# Altium PCB Etage Reception 2.PcbDoc
Units mm, origin at the board's own origin, x right, y up, seen from the top; angles counter-clockwise.
Board outline 70 x 70 mm, 4 copper layers (Top Layer, Internal Plane 1, Internal Plane 2, Bottom Layer); 25 components, 18 nets, 69 pads, 0 vias.
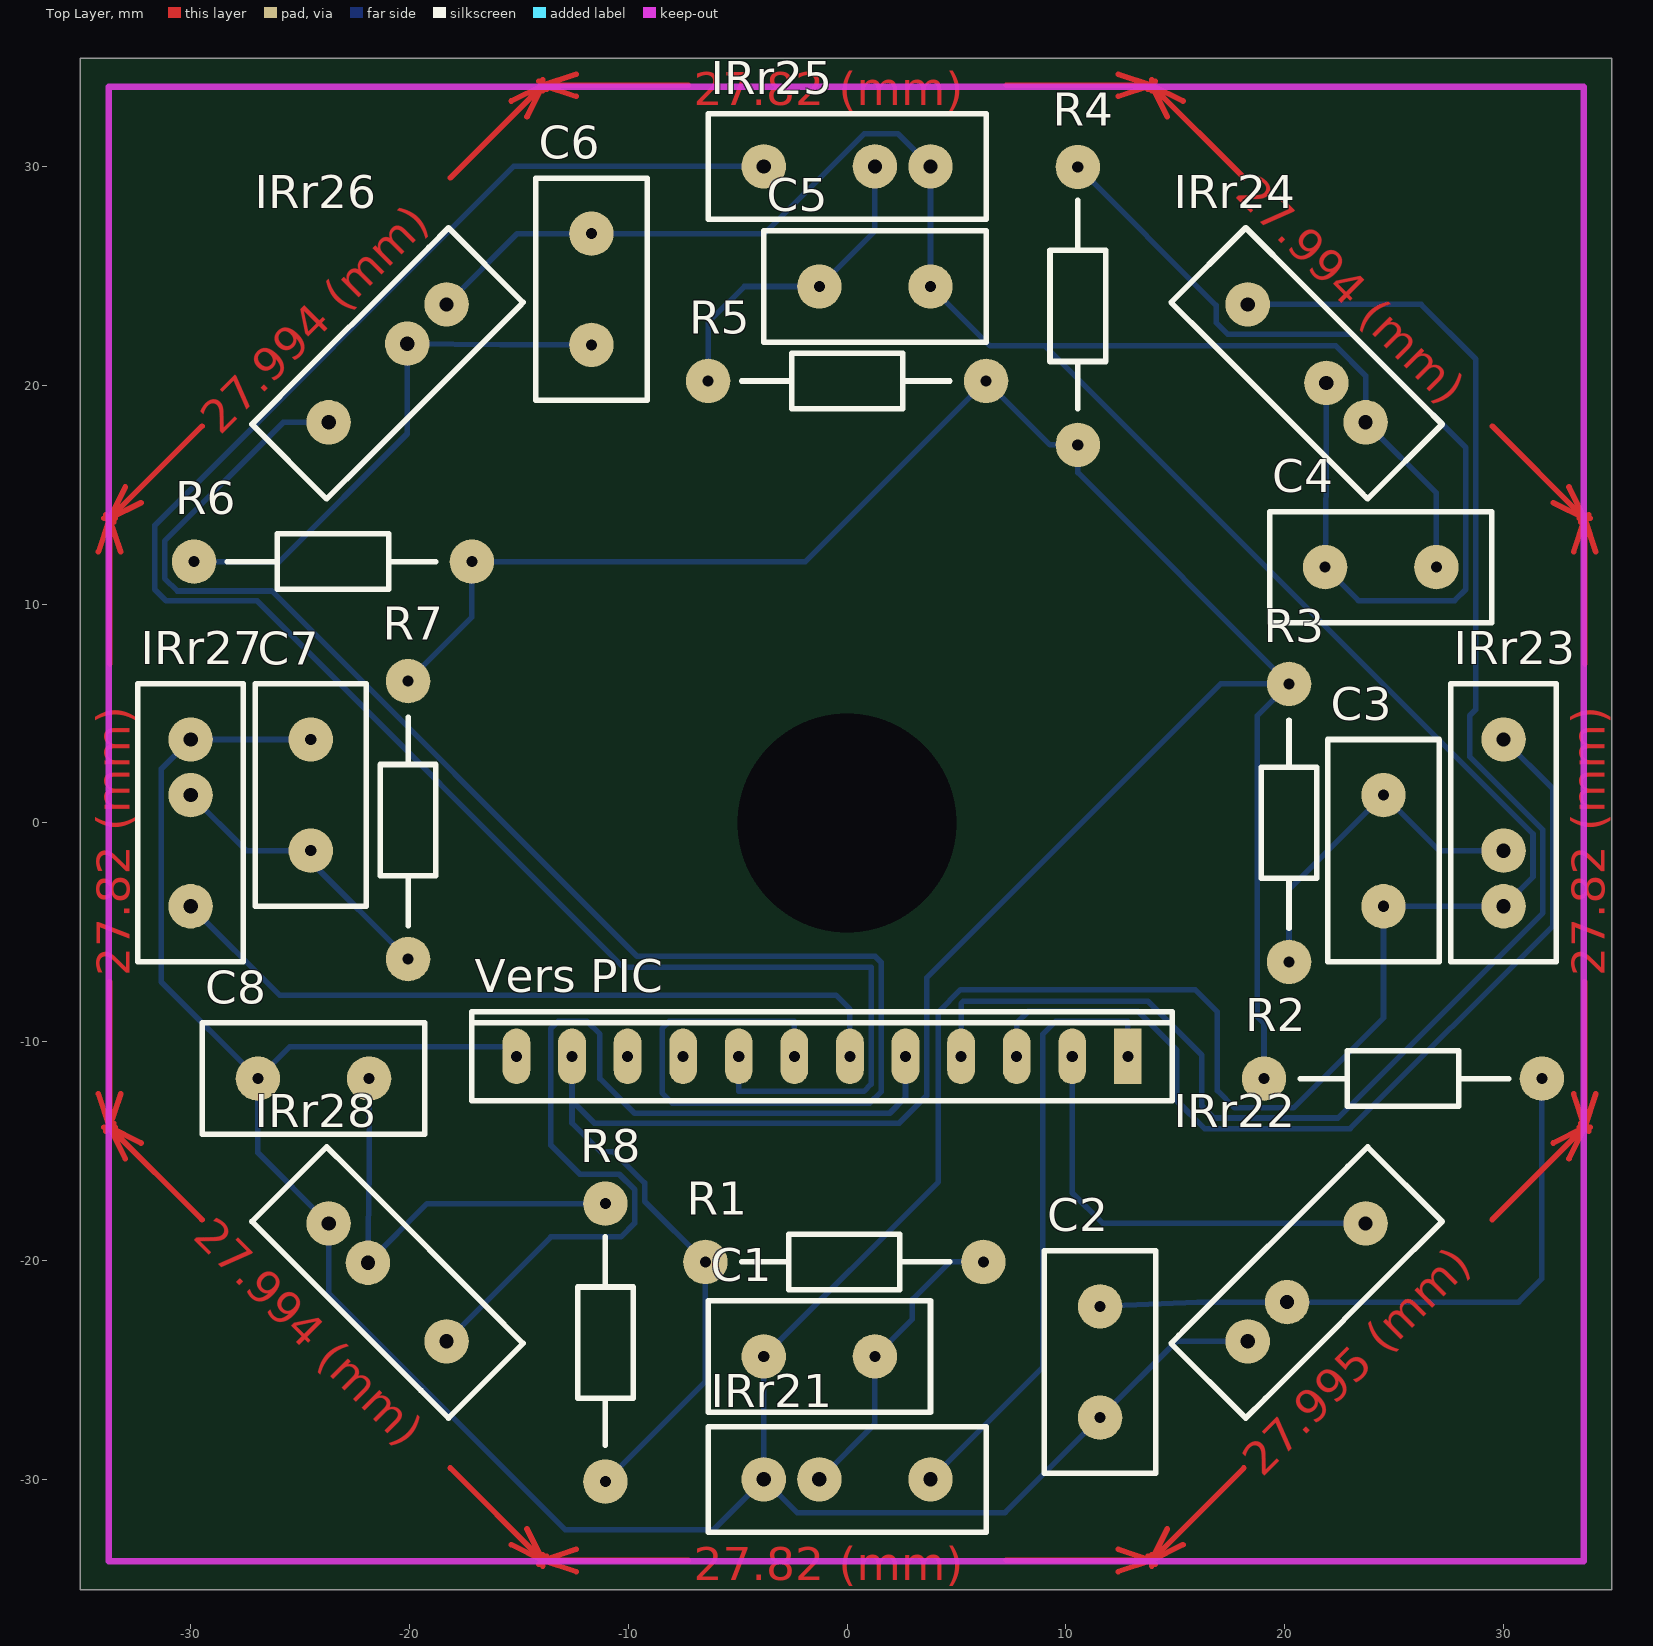
[diagram p0: Top Layer view]
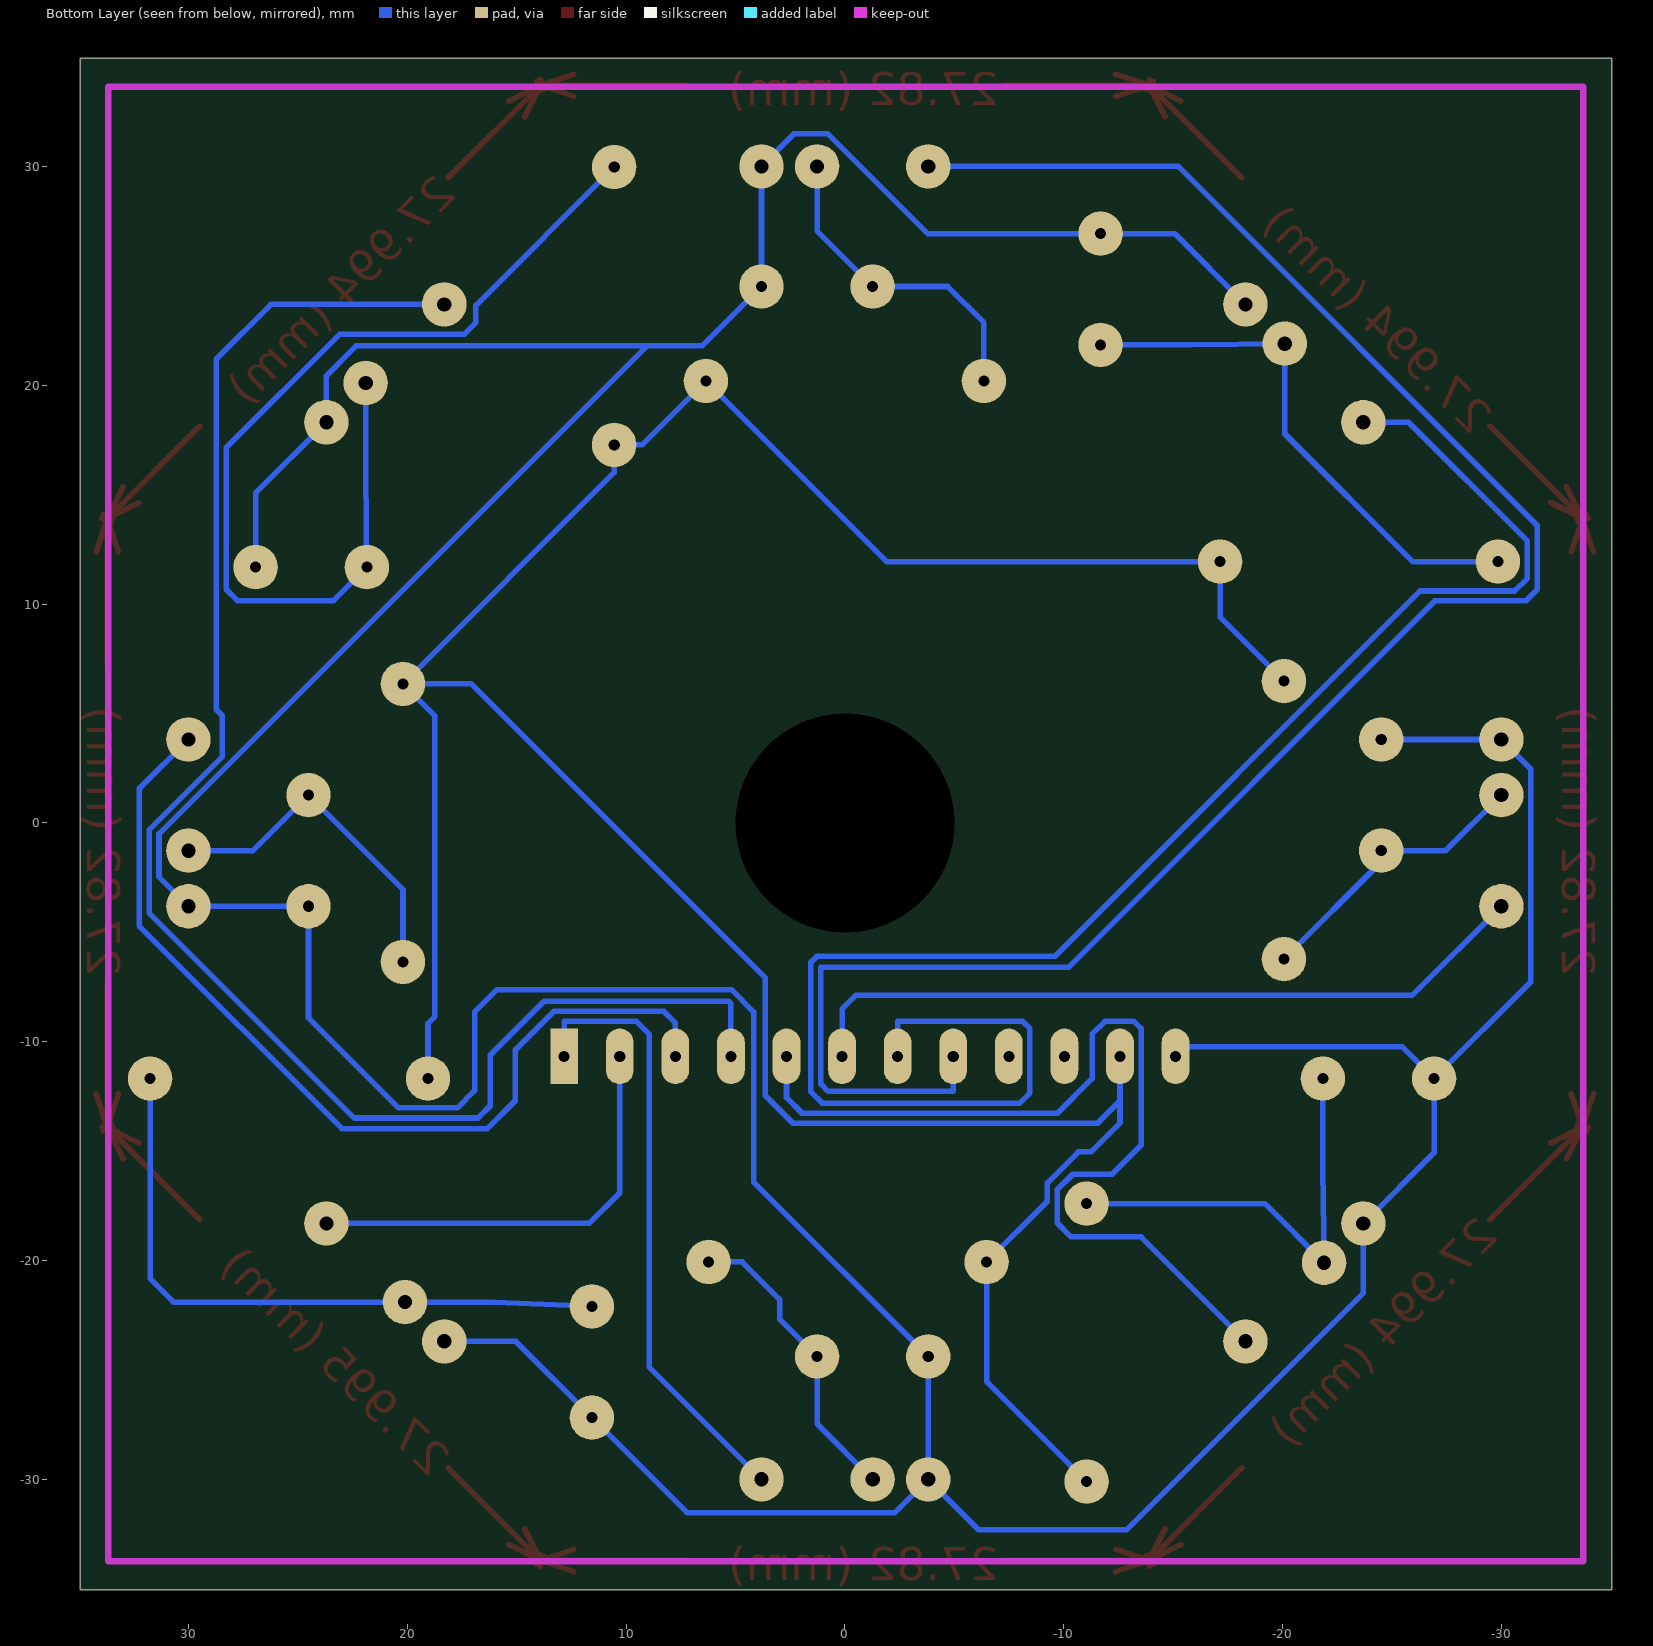
[diagram p1: Bottom Layer view, seen from below]
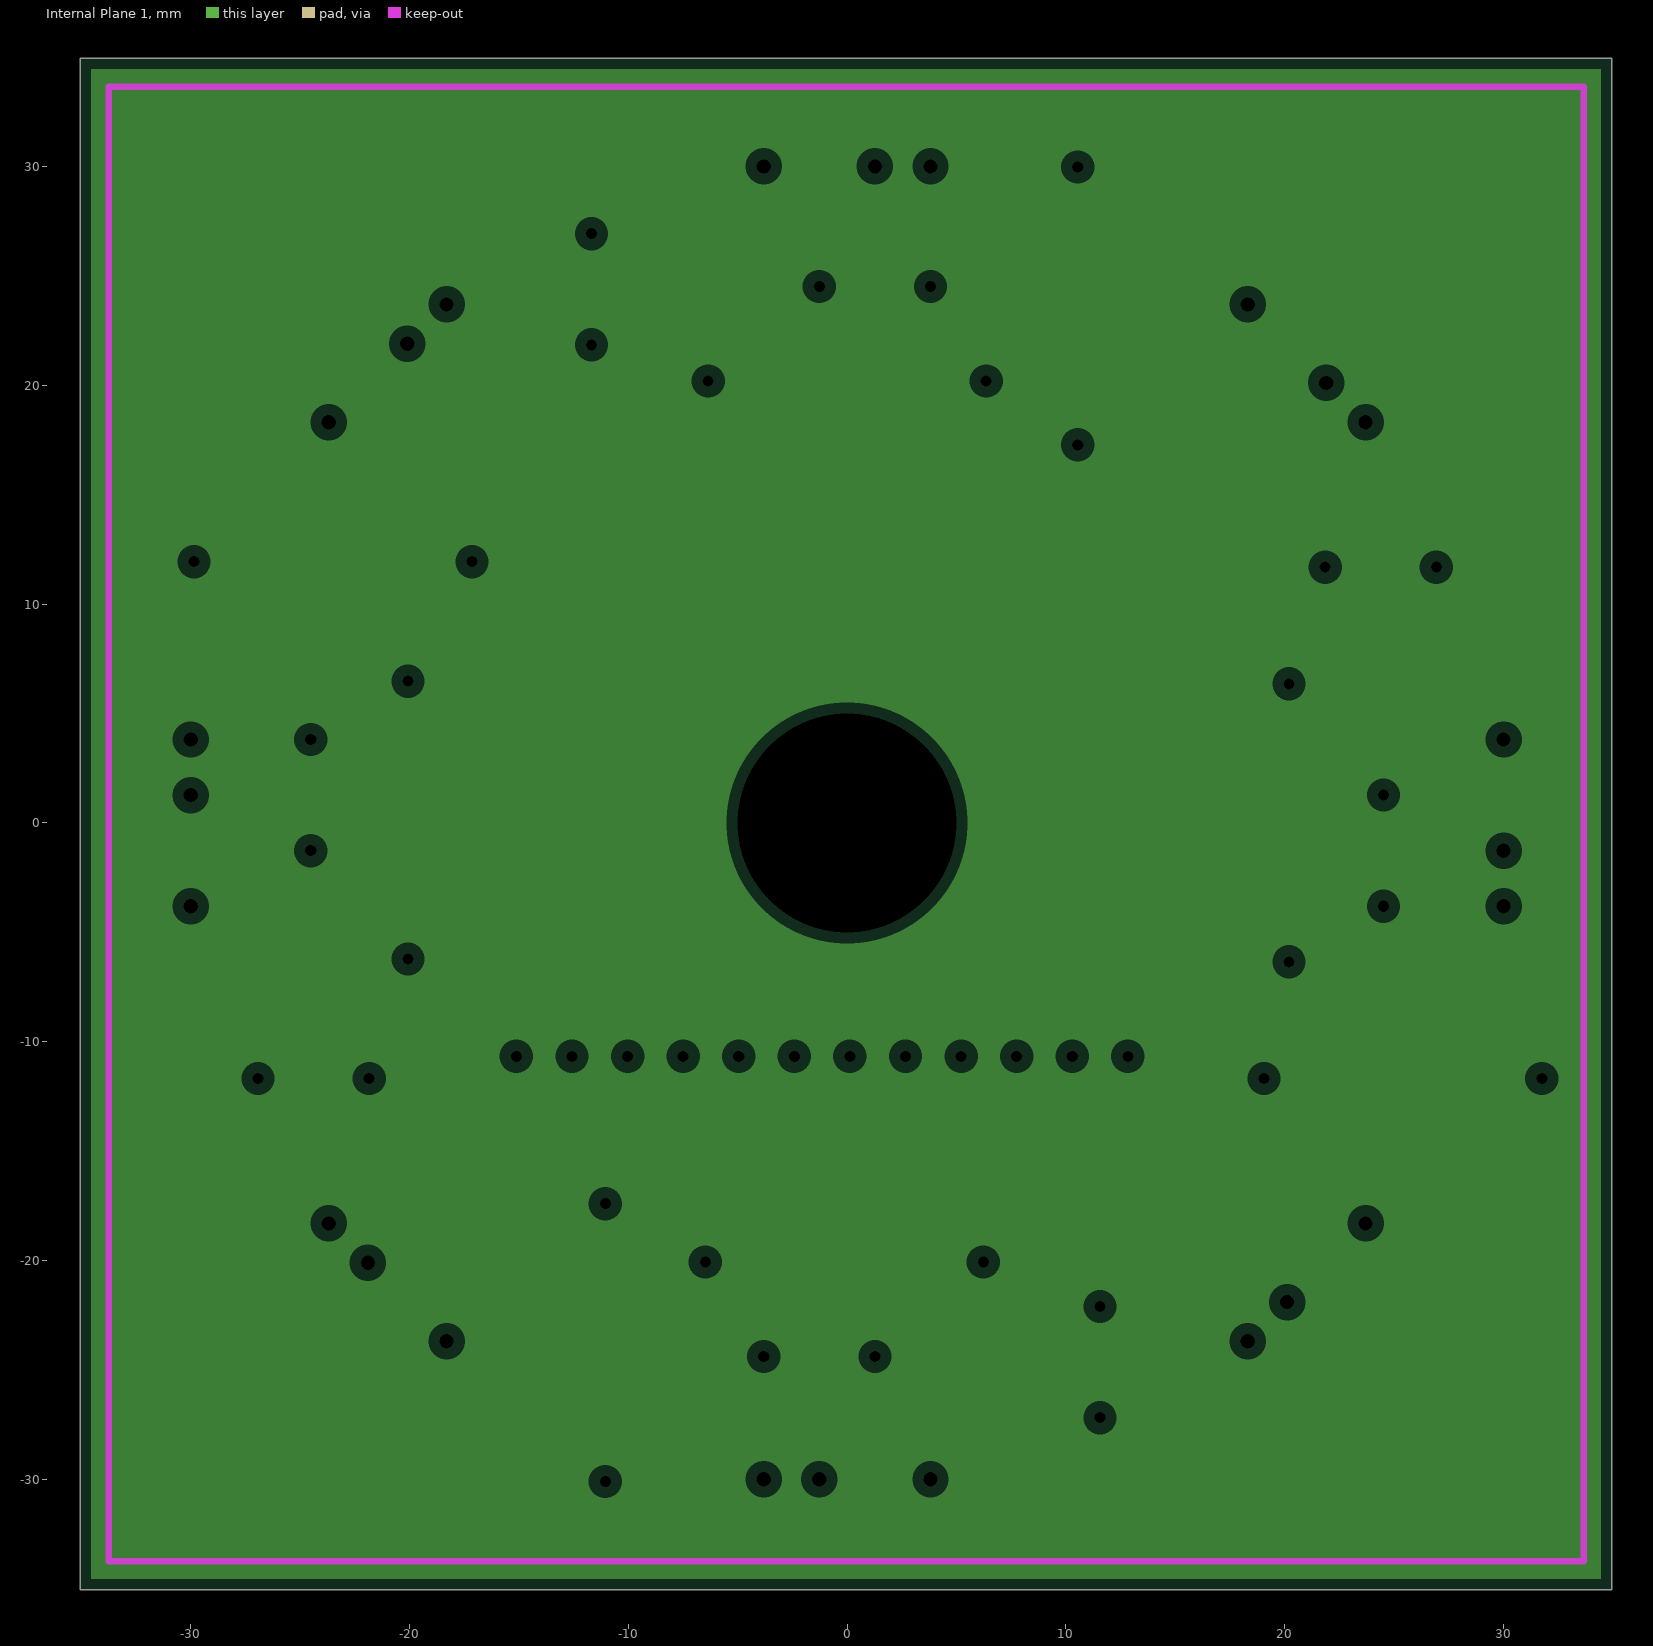
[diagram p2: Internal Plane 1, clearances drawn from the general rule]
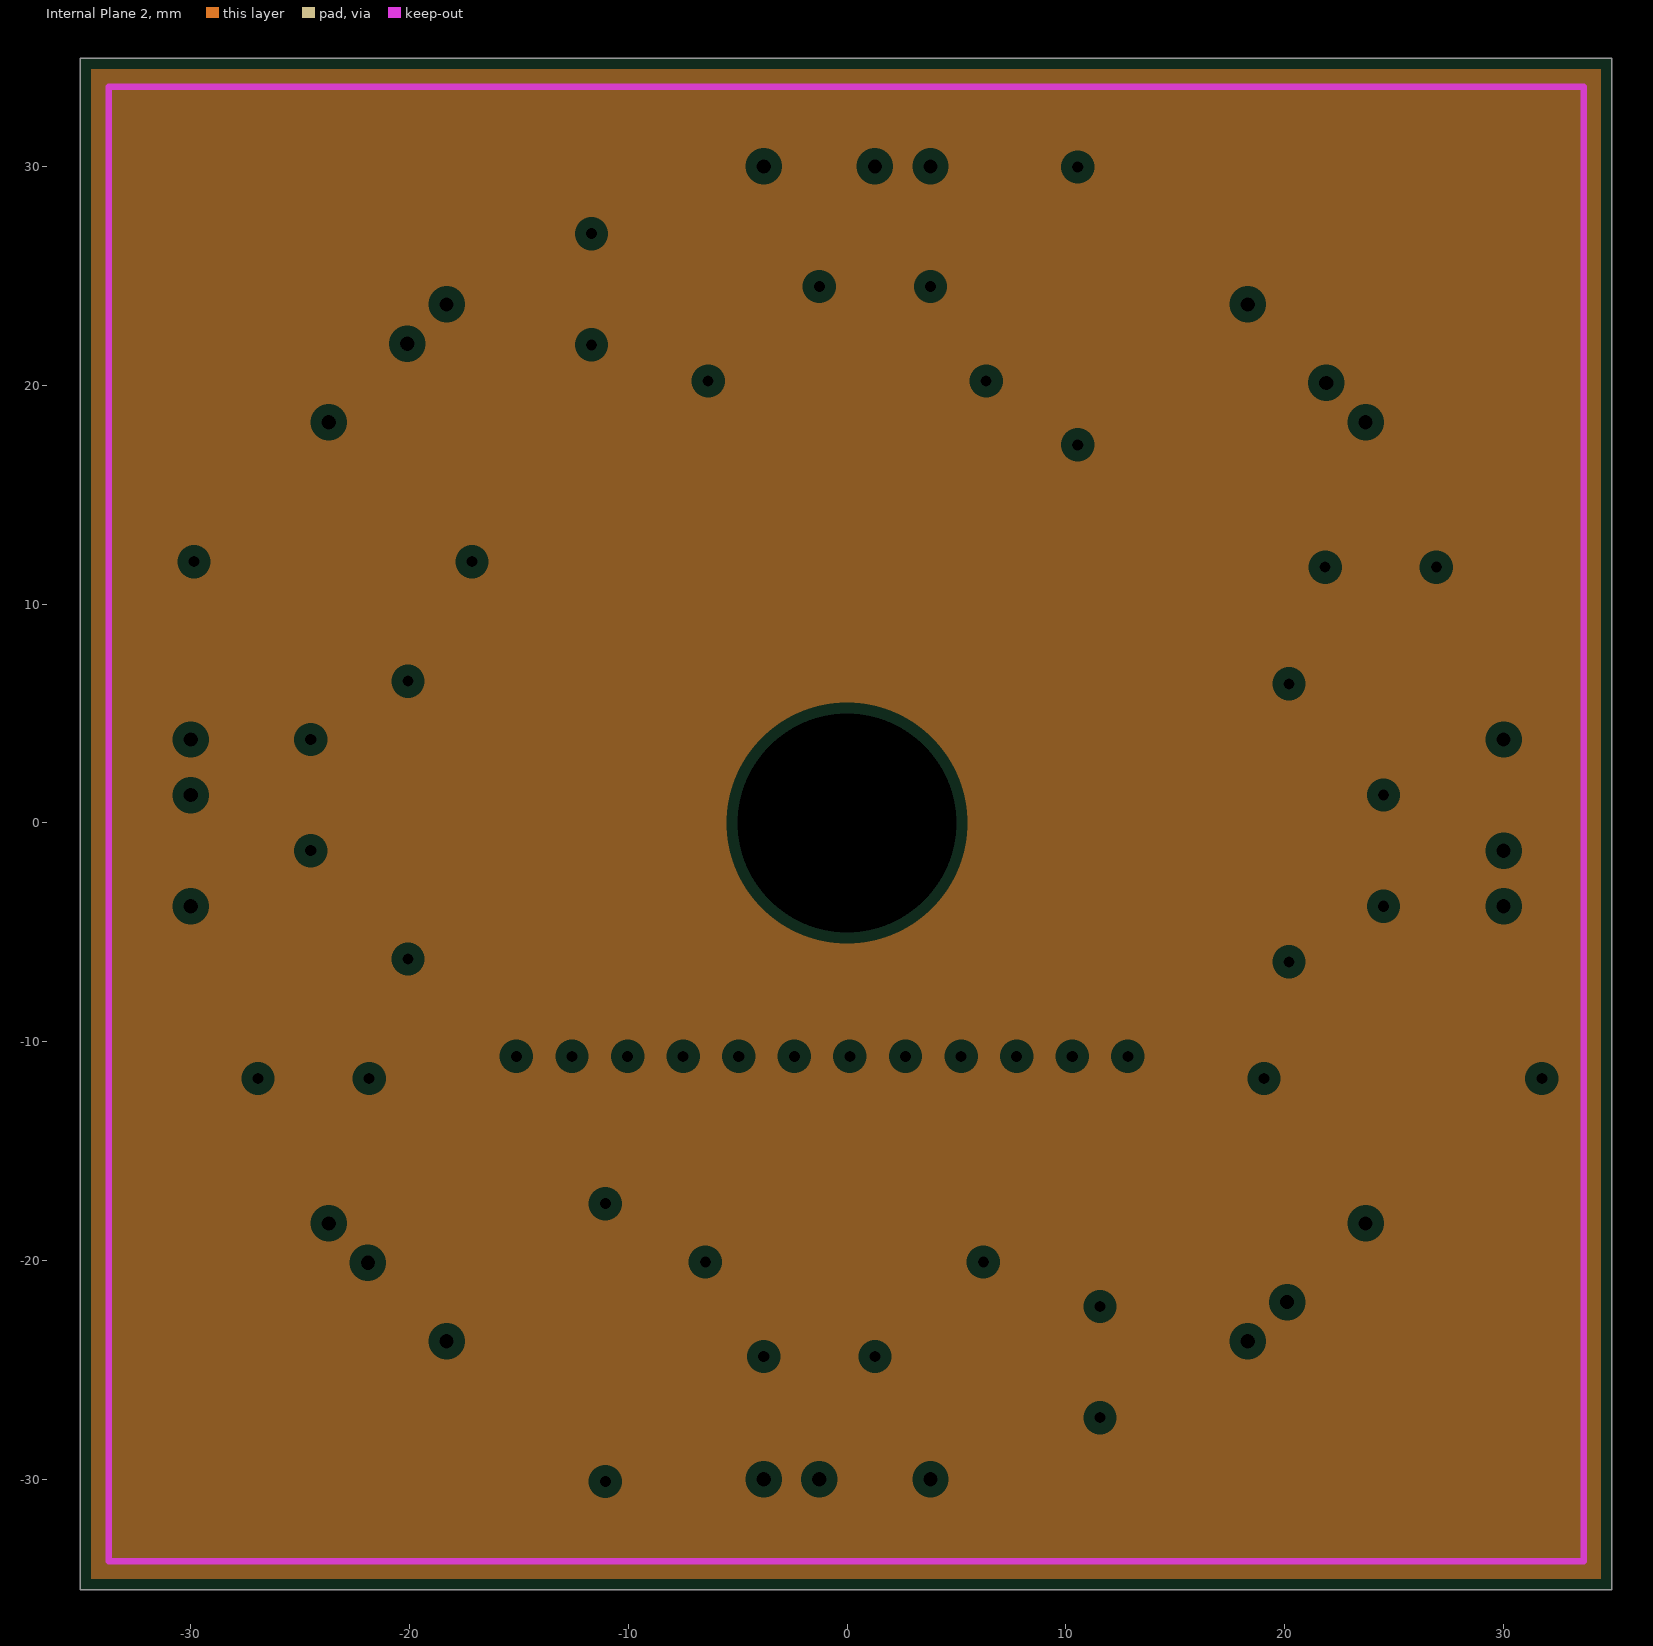
[diagram p3: Internal Plane 2, clearances drawn from the general rule]

## Layer stack, top to bottom
Top Layer: signal copper 0.0356
Dielectric: dielectric 0.32, FR-4, Dk 4.8
Internal Plane 1: plane copper 0.0356
Dielectric: dielectric 0.32, FR-4, Dk 4.8
Internal Plane 2: plane copper 0.0356
Dielectric: dielectric 0.32, FR-4, Dk 4.8
Bottom Layer: signal copper 0.0356

## Board outline
-35.052,-35.052 34.948,-35.052 34.948,34.948 -35.052,34.948

## Design rules (kind name [scope] priority, off if disabled: settings)
Clearance [All] p1: gap=0.2
PlaneClearance [All] p1: clearance=0.508
PlaneConnect [All] p1: planeconnectstyle=Relief reliefexpansion=0.508 reliefentries=4 reliefconductorwidth=0.254 reliefairgap=0.254
PolygonConnect [All] p1: connectstyle=Relief reliefconductorwidth=0.254 reliefentries=4 polygonreliefangle="90 Angle" airgapwidth=0.254
RoutingLayers [All] p1: top layer_v5=FALSE bottom layer_v5=TRUE
RoutingVias [All] p1: holewidth=0.6 width=1 viastyle="Through Hole" minholewidth=0.711 minwidth=1.27 maxholewidth=0.711 maxwidth=1.27
SolderMaskExpansion [All] p1: expansion=0.102
Width [All] p1: maxlimit=0.254 minlimit=0.254 preferedwidth=0.254
25 further rules are at their usual default settings.

## Components (designator, comment, footprint, x,y, rotation, side; value= is the part's Value field where it differs from the comment)
C1 "Cap2" CAPA2 1.27,-24.384 r180 top
C2 "Cap2" CAPA2 11.557,-22.098 r270 top
C3 "Cap2" CAPA2 24.511,1.27 r270 top
C4 "Cap2" CAPA2 21.844,11.684 r0 top
C5 "Cap2" CAPA2 -1.27,24.511 r0 top
C6 "Cap2" CAPA2 -11.684,21.844 r90 top
C7 "Cap2" CAPA2 -24.511,-1.27 r90 top
C8 "Cap2" CAPA2 -21.844,-11.684 r180 top
IRr21 "Recepteur IR" TSOP1138 0,-30 r180 top
IRr22 "Recepteur IR" TSOP1138 21,-21 r225 top
IRr23 "Recepteur IR" TSOP1138 30,0 r270 top
IRr24 "Recepteur IR" TSOP1138 21,21 r315 top
IRr25 "Recepteur IR" TSOP1138 0,30 r0 top
IRr26 "Recepteur IR" TSOP1138 -21,21 r45 top
IRr27 "Recepteur IR" TSOP1138 -30,0 r90 top
IRr28 "Recepteur IR" TSOP1138 -21,-21 r135 top
R1 "Res2" res5_1/4W 6.223,-20.066 r180 top
R2 "Res2" res5_1/4W 31.75,-11.684 r180 top
R3 "Res2" res5_1/4W 20.193,-6.35 r90 top
R4 "Res2" res5_1/4W 10.541,29.972 r270 top
R5 "Res2" res5_1/4W -6.35,20.193 r0 top
R6 "Res2" res5_1/4W -29.845,11.938 r0 top
R7 "Res2" res5_1/4W -20.066,-6.223 r90 top
R8 "Res2" res5_1/4W -11.049,-17.399 r270 top
"Vers PIC" "CONKK12" CONKK12 12.827,-10.668 r180 top

## Footprints (in the part's own frame and the unit in brackets; to place one, negate y for a bottom-side part, rotate by r counter-clockwise, add the part's x,y. Pads: shape width x height; smd on the part's side, far side on the other; paste and mask are expansions set on the pad)
CAPA2 [mil]
  round 80 hole 20: 1(0,0) 2(200,0)
  silkscreen extent -100,-100 300,100
CONKK12 [mil]
  rect 50x100 hole 20: 1(0,0)
  oval 50x100 hole 20: 2(100,0) 3(200,0) 4(300,0) 5(400,0) 6(500,0) 7(600,0) 8(700,0) 9(800,0) 10(900,0) 11(1000,0) 12(1100,0)
  silkscreen extent -80,-80 1180,80
res5_1/4W [mil]
  round 80 hole 20: 1(0,0) 2(500,0)
  silkscreen extent 60,-50 435,50
TSOP1138 [mil]
  round 80 hole 25.59: GND(150,0) Vo(-150,0) Vs(50,0)
  silkscreen extent -250,-95 250,95

## Part data
C1 C2 C3 C4 C5 C6 C7 C8: "Capacitor"
IRr21 IRr22 IRr23 IRr24 IRr25 IRr26 IRr27 IRr28: library part TSOP1138
R1 R2 R3 R4 R5 R6 R7 R8: "Resistor"

## Free pads (board coordinates)
  round 1.524 hole 10: 0(0,0)

## Nets (pads, with @x,y where several pads share a name; then routed paths per layer and width w, separated by ;. In a path a pad name is that pad's centre, name@x,y a point inside that pad or via, vN(x,y) a via of type N, cw(c..) or ccw(c..) an arc to the next point about the centre after c; other vN are vias at no path point)
GND: "Vers PIC.12" C1.2 C2.2 C3.2 C4.2 C5.2 C6.2 C7.2 C8.2 IRr21.GND IRr22.GND IRr23.GND IRr24.GND IRr25.GND IRr26.GND IRr27.GND IRr28.GND | length 259.3
  Bottom Layer w0.254: C7.2 IRr27.GND -31.344,2.466 -31.344,-7.264 C8.2 ; IRr26.GND -15.076,26.924 C6.2 -3.782,26.924 0.79,31.496 2.314,31.496 IRr25.GND C5.2 6.528,21.793 9.042,21.793 ; -15.113,-10.668 -15.113,-10.236 -25.476,-10.236 C8.2 ; IRr22.GND 15.041,-23.694 C2.2 7.214,-31.521 -2.289,-31.521 IRr21.GND ; C4.2 26.924,15.076 IRr24.GND 23.694,20.431 22.332,21.793 9.042,21.793 ; C8.2 -26.924,-15.076 IRr28.GND -23.694,-21.493 -12.878,-32.309 -6.119,-32.309 IRr21.GND ; IRr21.GND C1.2 4.166,-16.408 4.166,-8.636 5.182,-7.62 15.9,-7.62 16.916,-8.636 16.916,-12.24 17.704,-13.027 20.396,-13.027 24.511,-8.912 C3.2 IRr23.GND 31.343,-2.467 31.343,-0.508 9.042,21.793
NetC1_1: C1.1 IRr21.Vs R1.1 | length 13.9
  Bottom Layer w0.254: IRr21.Vs 1.27,-27.46 C1.1 2.977,-22.677 2.977,-21.78 4.691,-20.066 R1.1
NetC2_1: C2.1 IRr22.Vs R2.1 | length 29.8
  Bottom Layer w0.254: C2.1 16.024,-21.898 IRr22.Vs 30.68,-21.898 31.75,-20.828 R2.1
NetC3_1: C3.1 IRr23.Vs R3.1 | length 15.9
  Bottom Layer w0.254: R3.1 20.193,-3.048 C3.1 27.051,-1.27 IRr23.Vs
NetC4_1: C4.1 IRr24.Vs R4.1 | length 45.7
  Bottom Layer w0.254: R4.1 16.866,23.647 16.866,22.86 17.399,22.327 23.089,22.327 28.27,17.145 28.27,10.668 27.762,10.16 23.368,10.16 C4.1 21.898,15.929 IRr24.Vs
NetC5_1: C5.1 IRr25.Vs R5.1 | length 15
  Bottom Layer w0.254: R5.1 -6.35,22.86 -4.699,24.511 C5.1 1.27,27.051 IRr25.Vs
NetC6_1: C6.1 IRr26.Vs R6.1 | length 24.7
  Bottom Layer w0.254: R6.1 -25.944,11.938 -20.102,17.78 IRr26.Vs -15.821,21.844 C6.1
NetC7_1: C7.1 IRr27.Vs R7.1 | length 13.3
  Bottom Layer w0.254: IRr27.Vs -27.46,-1.27 C7.1 -24.511,-1.778 R7.1
NetC8_1: C8.1 IRr28.Vs R8.1 | length 20.4
  Bottom Layer w0.254: C8.1 -21.844,-15.821 IRr28.Vs -19.195,-17.399 R8.1
NetIRr21_3: "Vers PIC.1" IRr21.Vo | length 28.2
  Bottom Layer w0.254: IRr21.Vo 8.941,-24.869 8.941,-9.652 9.525,-9.068 12.827,-9.068 12.827,-10.668
NetIRr22_3: "Vers PIC.2" IRr22.Vo | length 20.2
  Bottom Layer w0.254: 10.287,-10.668 10.287,-16.909 11.684,-18.306 IRr22.Vo
NetIRr23_3: "Vers PIC.3" IRr23.Vo | length 43.1
  Bottom Layer w0.254: 7.747,-10.668 7.747,-9.144 8.28,-8.611 13.284,-8.611 15.062,-10.389 15.062,-12.7 16.332,-13.97 22.987,-13.97 32.251,-4.706 32.251,1.559 IRr23.Vo
NetIRr24_3: "Vers PIC.4" IRr24.Vo | length 74.8
  Bottom Layer w0.254: 5.207,-10.668 5.207,-8.255 5.309,-8.153 13.741,-8.153 16.205,-10.617 16.205,-12.929 16.764,-13.487 22.428,-13.487 31.797,-4.119 31.797,-0.32 28.448,3.029 28.448,4.896 28.727,5.175 28.727,21.194 26.228,23.694 IRr24.Vo
NetIRr25_3: "Vers PIC.8" IRr25.Vo | length 90.6
  Bottom Layer w0.254: -4.953,-10.668 -4.953,-12.268 0.762,-12.268 1.092,-11.938 1.092,-6.604 -10.211,-6.604 -26.956,10.141 -31.115,10.141 -31.642,10.668 -31.642,13.595 -15.237,30 IRr25.Vo
NetIRr26_3: "Vers PIC.7" IRr26.Vo | length 78.5
  Bottom Layer w0.254: IRr26.Vo -25.763,18.306 -31.188,12.881 -31.188,11.176 -30.607,10.595 -26.289,10.595 -9.598,-6.096 1.277,-6.096 1.549,-6.368 1.549,-12.294 1.035,-12.808 -7.995,-12.808 -8.458,-12.344 -8.458,-9.398 -8.128,-9.068 -2.413,-9.068 -2.413,-10.668
NetIRr27_3: "Vers PIC.6" IRr27.Vo | length 34.2
  Bottom Layer w0.254: IRr27.Vo -25.936,-7.874 -0.508,-7.874 0.127,-8.509 0.127,-10.668
NetIRr28_3: "Vers PIC.5" IRr28.Vo | length 43.8
  Bottom Layer w0.254: IRr28.Vo -13.535,-18.923 -10.341,-18.923 -9.706,-18.288 -9.706,-16.764 -10.414,-16.056 -12.214,-16.056 -13.538,-14.732 -13.538,-9.398 -13.208,-9.068 -11.887,-9.068 -11.303,-9.652 -11.303,-11.684 -9.716,-13.271 1.946,-13.271 2.667,-12.551 2.667,-10.668
VREG: "Vers PIC.11" R1.2 R2.2 R3.2 R4.2 R5.2 R6.2 R7.2 R8.2 | length 141.5
  Bottom Layer w0.254: R7.2 -17.145,9.398 R6.2 -1.905,11.938 R5.2 9.271,17.272 R4.2 10.541,16.002 R3.2 ; -12.573,-10.668 -12.573,-12.7 ; R8.2 -6.477,-25.527 R1.2 -9.252,-17.291 -9.252,-16.453 -10.668,-15.037 -11.252,-15.037 -12.573,-13.716 -12.573,-12.7 ; R2.2 19.05,-9.169 18.745,-8.865 18.745,4.902 R3.2 ; -12.573,-12.7 -11.548,-13.725 2.378,-13.725 3.632,-12.471 3.632,-7.087 17.069,6.35 R3.2
pads on no net: "Vers PIC.9" "Vers PIC.10"
copper on no net: | length 160.5
  Top Layer w0.254: -34.213,-12.386 -33.705,-13.91 ; -34.213,12.386 -33.705,13.91 ; -33.959,-13.91 -33.451,-13.91 ; -33.959,13.91 -33.451,13.91 ; -33.885,-14.09 -33.525,-13.73 ; -33.885,14.09 -33.525,13.73 ; -33.705,-7.262 -33.705,-13.91 ; -33.705,7.262 -33.705,13.91 ; -33.197,-12.386 -33.705,-13.91 ; -33.197,12.386 -33.705,13.91 ; -32.987,-15.347 -33.705,-13.91 ; -32.987,15.347 -33.705,13.91 ; -32.268,-14.628 -33.705,-13.91 ; -32.268,14.628 -33.705,13.91 ; -29.481,-18.134 -33.705,-13.91 ; -29.481,18.134 -33.705,13.91 ; -18.134,-29.481 -13.91,-33.705 ; -18.134,29.481 -13.91,33.705 ; -15.347,-32.987 -13.91,-33.705 ; -15.347,32.987 -13.91,33.705 ; -14.628,-32.268 -13.91,-33.705 ; -14.628,32.268 -13.91,33.705 ; -14.09,-33.885 -13.73,-33.525 ; -14.09,33.885 -13.73,33.525 ; -13.91,-33.959 -13.91,-33.451 ; -13.91,33.451 -13.91,33.959 ; -12.386,-34.213 -13.91,-33.705 ; -12.386,-33.197 -13.91,-33.705 ; -12.386,33.197 -13.91,33.705 ; -12.386,34.213 -13.91,33.705 ; -7.262,-33.705 -13.91,-33.705 ; -7.262,33.705 -13.91,33.705 ; 7.262,-33.705 13.91,-33.705 ; 7.262,33.705 13.91,33.705 ; 12.386,-34.213 13.91,-33.705 ; 12.386,-33.197 13.91,-33.705 ; 12.386,33.197 13.91,33.705 ; 12.386,34.213 13.91,33.705 ; 13.73,-33.526 14.09,-33.885 ; 13.73,33.525 14.09,33.885 ; 13.91,-33.959 13.91,-33.451 ; 13.91,33.451 13.91,33.959 ; 14.628,-32.269 13.91,-33.705 ; 14.628,32.268 13.91,33.705 ; 15.347,-32.987 13.91,-33.705 ; 15.347,32.987 13.91,33.705 ; 18.134,-29.482 13.91,-33.705 ; 18.134,29.481 13.91,33.705 ; 29.481,-18.134 33.705,-13.91 ; 29.481,18.134 33.705,13.91 ; 32.268,-14.628 33.705,-13.91 ; 32.268,14.628 33.705,13.91 ; 32.987,-15.347 33.705,-13.91 ; 32.987,15.347 33.705,13.91 ; 33.197,-12.386 33.705,-13.91 ; 33.197,12.386 33.705,13.91 ; 33.451,-13.91 33.959,-13.91 ; 33.451,13.91 33.959,13.91 ; 33.525,-13.73 33.885,-14.09 ; 33.525,13.73 33.885,14.09 ; 33.705,-7.262 33.705,-13.91 ; 33.705,7.262 33.705,13.91 ; 34.213,-12.386 33.705,-13.91 ; 34.213,12.386 33.705,13.91

## Polygon pours and split planes (outlines as drawn)
no net on Internal Plane 1 (split plane): 34.438,-34.542 -34.542,-34.542 -34.542,34.438 34.438,34.438
no net on Internal Plane 2 (split plane): 34.438,-34.542 -34.542,-34.542 -34.542,34.438 34.438,34.438

## Keep-outs
Keep-Out Layer:
  lines w0.3: -33.752,-33.752 33.655,-33.752 33.655,33.648 -33.752,33.648 -33.752,-33.752

## Other copper
Top Layer:
  text "27.82 (mm)" at -7.008,32.791 h1.52
  text "27.994 (mm)" at 17.667,28.655 h1.52 r315
  text "27.994 (mm)" at -28.655,17.667 h1.52 r45
  text "27.82 (mm)" at -32.791,-7.008 h1.52 r90
  text "27.82 (mm)" at 34.619,-7.008 h1.52 r90
  text "27.994 (mm)" at -29.948,-18.96 h1.52 r315
  text "27.995 (mm)" at 18.96,-29.948 h1.52 r45
  text "27.82 (mm)" at -7.008,-34.619 h1.52

## Silkscreen, mask and mechanical layers (free items; w line width, h text height)
Drill Drawing:
  text ".LEGEND" at -68.176,-73.914 h1.52
  text "Drill Drawing." at -68.176,-76.454 h1.52

## Dimensions
-33.752,-33.752 to 33.655,-33.752 on Mechanical 1
-33.752,-33.752 to -33.752,33.648 on Mechanical 1